# Altium PCB CSP - potentiometers_a.PcbDoc
Units mm, origin at the board's own origin, x right, y up, seen from the top; angles counter-clockwise.
Board outline 41.66 x 43.94 mm, 2 copper layers (Top Layer, Bottom Layer); 38 components, 21 nets, 80 pads, 0 vias.
Unrouted connection lines stored in the file: 10.
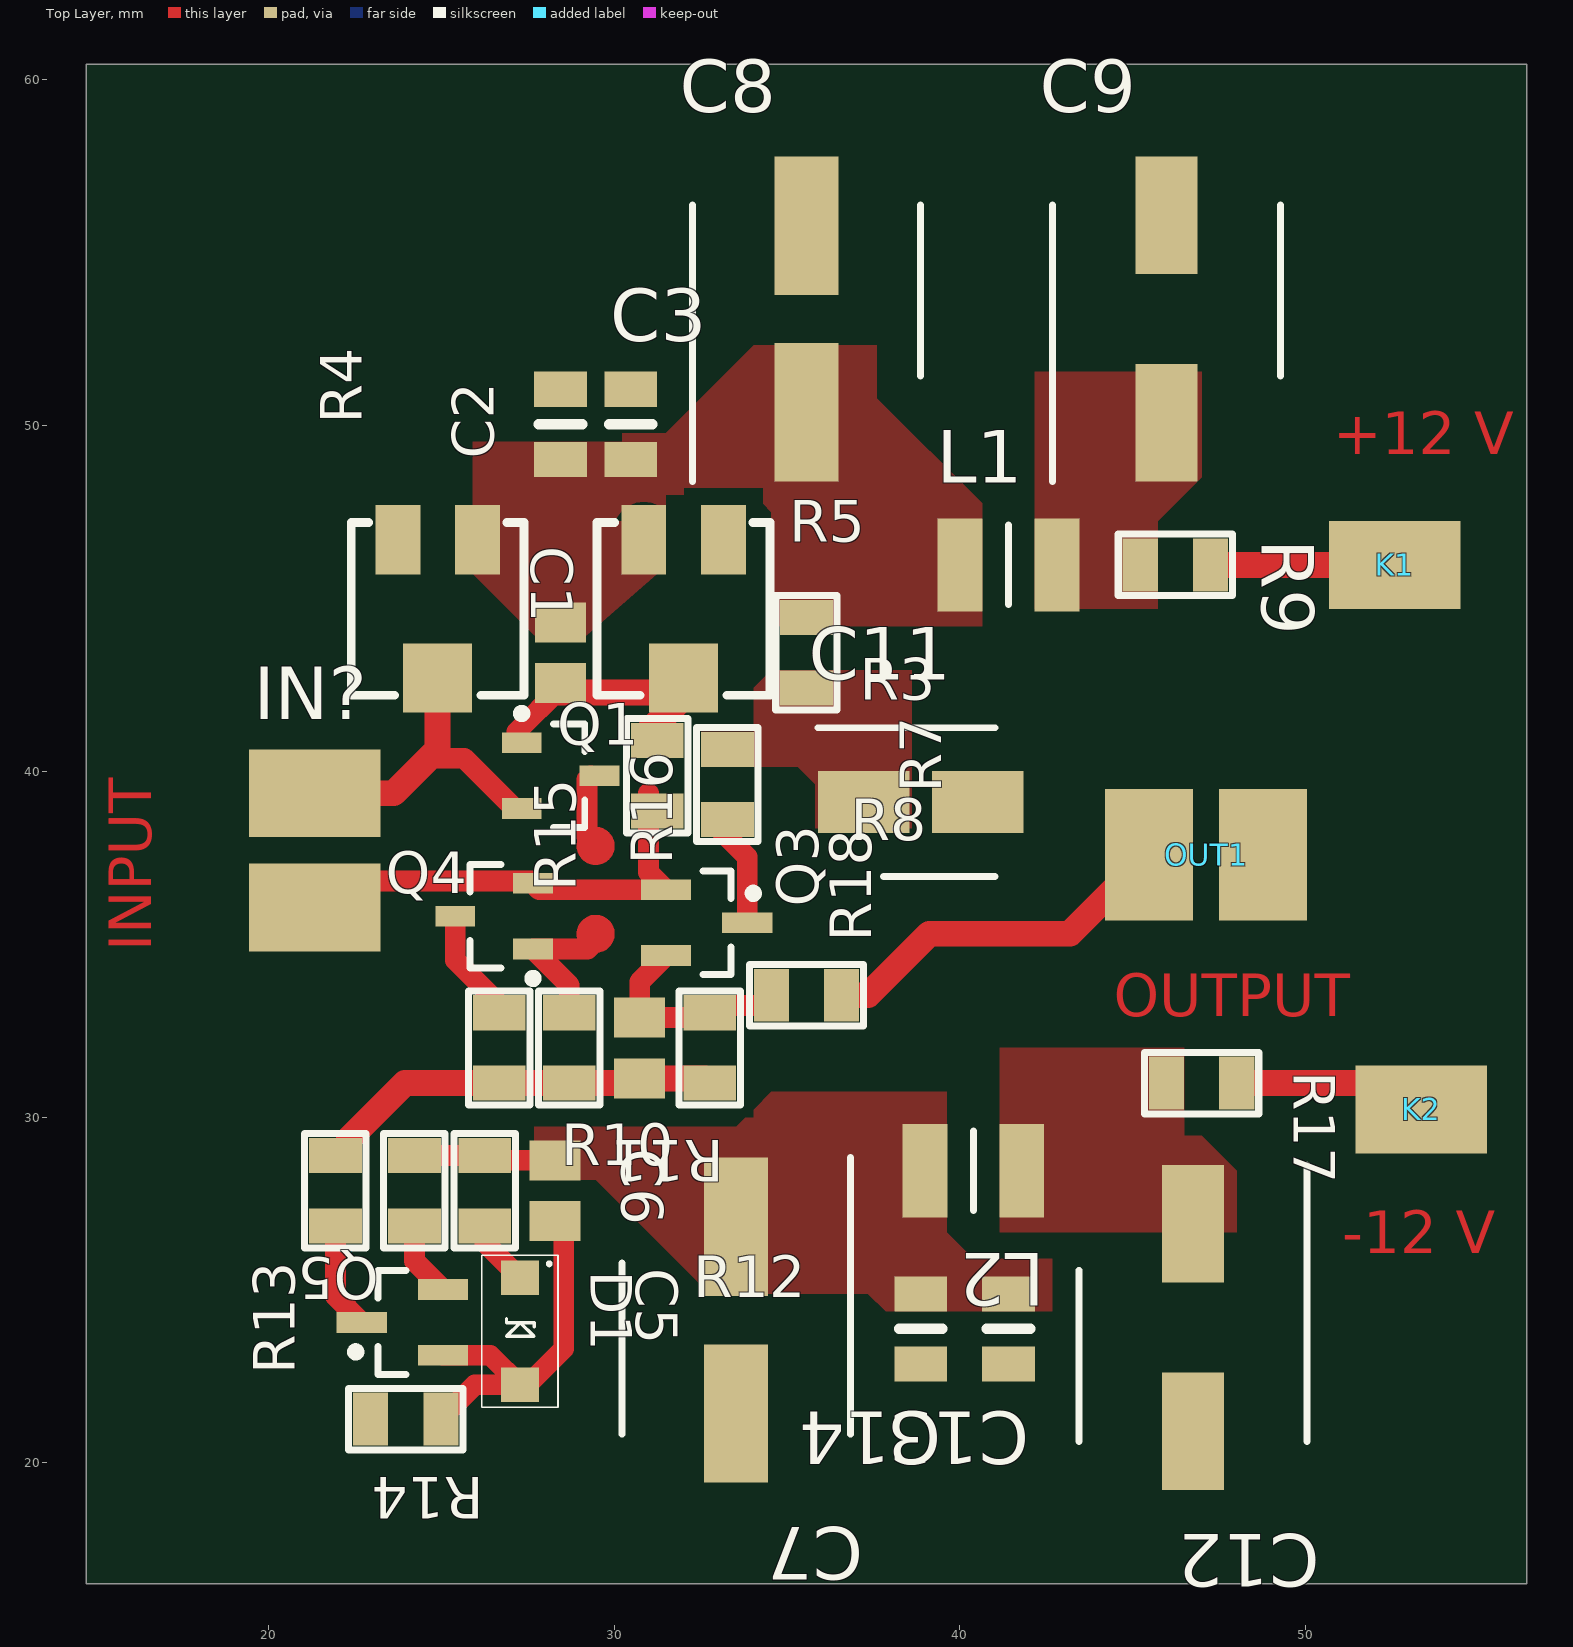
[diagram p0: Top Layer view]
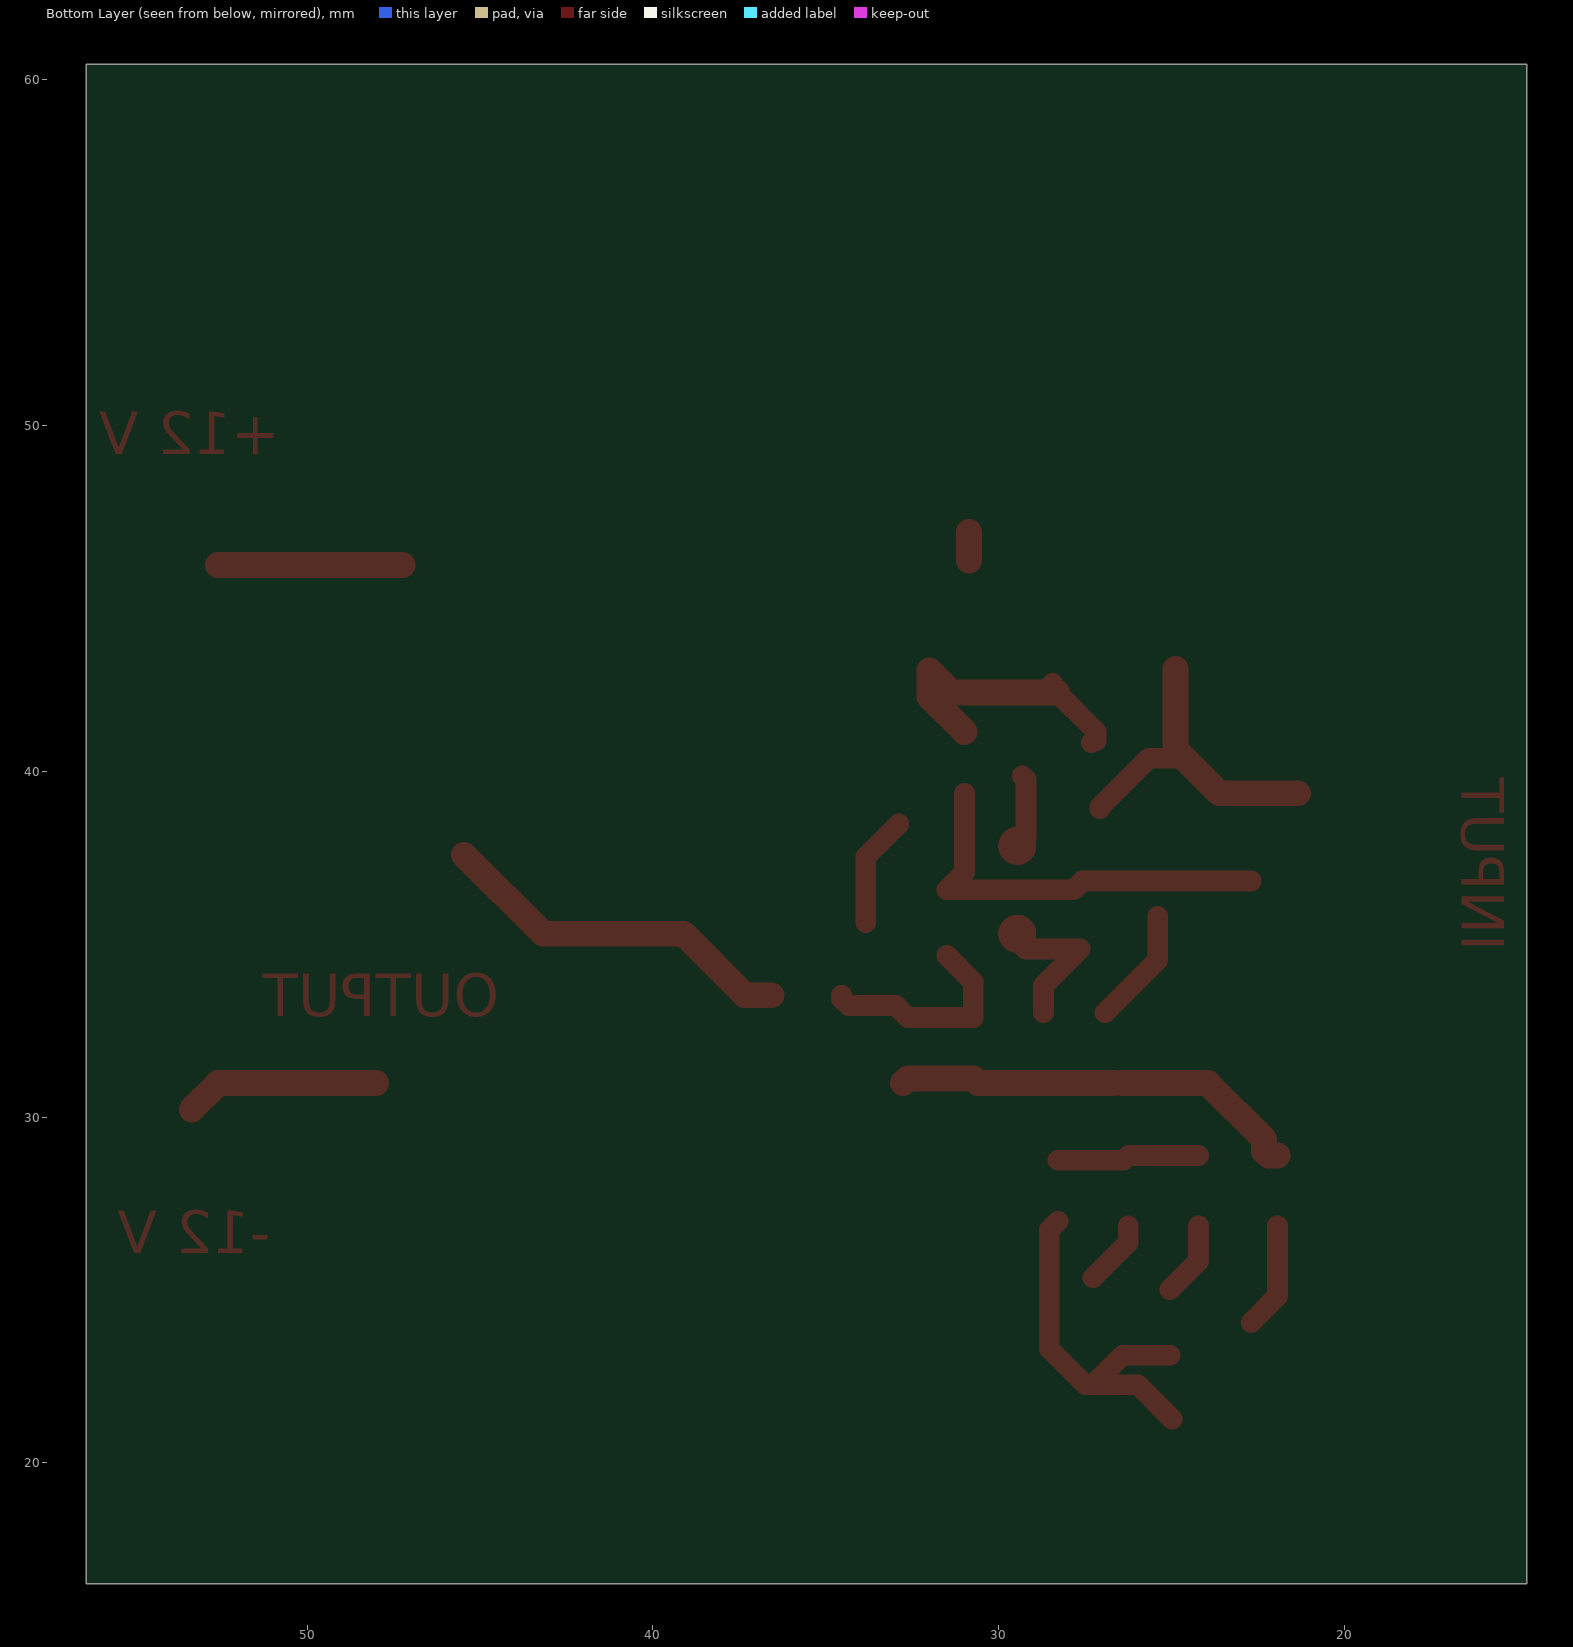
[diagram p1: Bottom Layer view, seen from below]
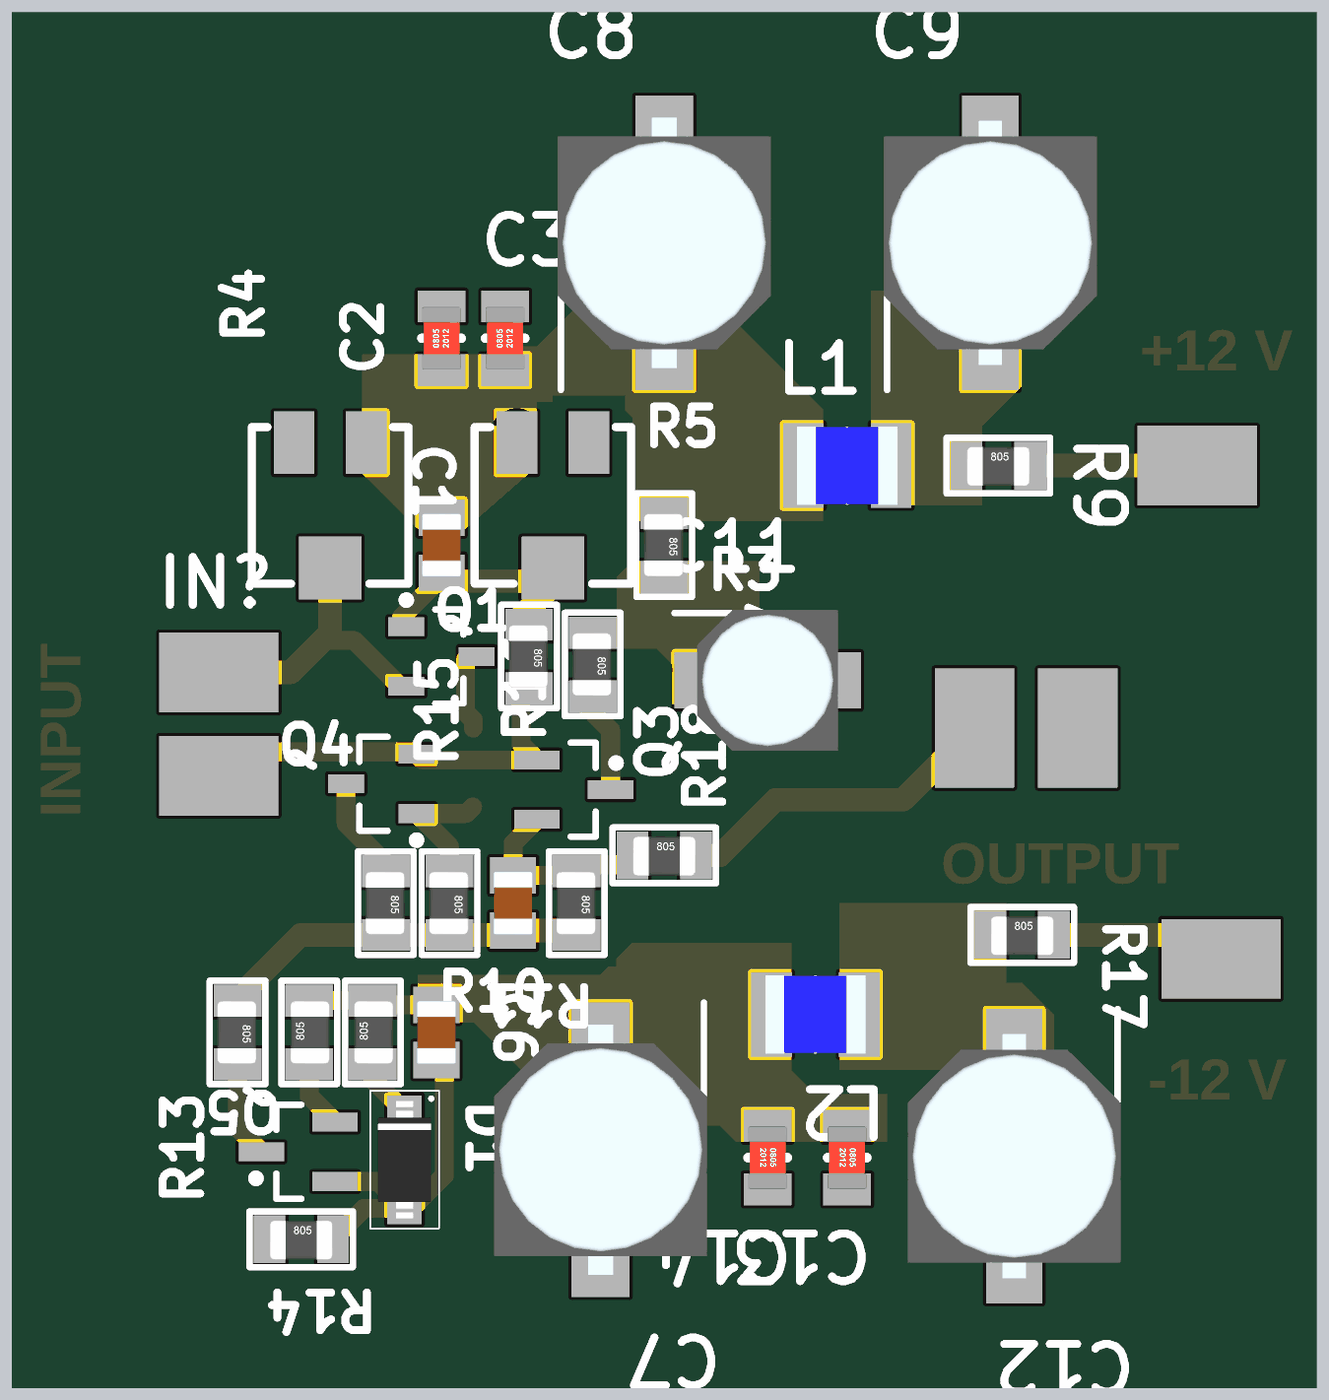
[diagram p2: 3D render of the assembled board from above, using the file's embedded part models]

## Layer stack, top to bottom
Top Solder: solder mask 0.0102, Solder Resist, Dk 3.5
Top Layer: signal copper 0.0356
Dielectric 1: dielectric 0.32, FR-4, Dk 4.8
Bottom Layer: signal copper 0.0356
Bottom Solder: solder mask 0.0102, Solder Resist, Dk 3.5

## Board outline
14.732,16.51 56.388,16.51 56.388,60.452 14.732,60.452

## Design rules (kind name [scope] priority, off if disabled: settings)
Clearance [All] p1: gap=0.254 ignorepadtopadclearanceinfootprint=FALSE except(0: Arc-Hole Track-Hole SMDPad-Hole THPad-Hole Via-Hole Fill-Hole Poly-Text Poly-Hole Region-Hole Text-Hole; 0.3: Arc-Arc Arc-Track Arc-SMDPad Arc-THPad Arc-Via Arc-Fill Arc-Poly Arc-Region Arc-Text Track-Track Track-SMDPad Track-THPad Track-Via Track-Fill Track-Region Track-Text; 0.5: Track-Poly SMDPad-Poly)
PlaneConnect [All] p1: planeconnectstyle=Direct reliefexpansion=0.508 reliefentries=4 reliefconductorwidth=0.254 reliefairgap=0.254
PolygonConnect [All] p1: connectstyle=Direct reliefconductorwidth=0.254 reliefentries=4 polygonreliefangle="90 Angle" airgapwidth=0.254
RoutingVias [All] p1: holewidth=0.711 width=1.27 viastyle="Through Hole" minholewidth=0.711 minwidth=1.27 maxholewidth=0.711 maxwidth=1.27
SolderMaskExpansion [All] p1: expansion=0.102 istentingtop=FALSE
Width [All] p1: maxlimit=1 minlimit=0.254 preferedwidth=0.6 toplayer_minwidth=0.5 bottomlayer_maxwidth=0.254 bottomlayer_prefwidth=0.254 minimp=50.000000 maximp=50.000000 favimp=50.000000
29 further rules are at their usual default settings.

## Components (designator, comment, footprint, x,y, rotation, side; value= is the part's Value field where it differs from the comment)
C1 "Cap" *CAPC2012X94N 28.448,43.434 r90 top value=1uF
C2 "Cap" SMD-0805C 28.448,50.038 r0 top value=0.1uF
C3 "Cap" SMD-0805C 30.48,50.038 r0 top value=0.01uF
C5 "Cap" *CAPC2012X94N 30.734,32.004 r90 top value=1uF
C6 "Cap" *CAPC2012X94N 28.286,27.874 r270 top value=0.01uF
C7 "#NAME?" CAPAE660X550N 33.528,24.13 r270 top value=22uF
C8 "#NAME?" CAPAE660X550N 35.56,53.086 r90 top value=22uF
C9 "#NAME?" CAPAE660X800N 45.974,53.086 r90 top value=100uF
C11 "#NAME?" CAPAE430X550N 38.862,39.116 r0 top value=1uF
C12 "#NAME?" CAPAE660X800N 46.736,23.924 r270 top value=100uF
C13 "Cap" SMD-0805C 41.402,23.876 r180 top value=0.1uF
C14 "Cap" SMD-0805C 38.862,23.876 r180 top value=0.01uF
D1 "Diode" SODFL350X110-2N 27.27,23.81 r270 top
IN? "INPUT" IN/OUT 21.336,39.37 r0 top
K1 "+12V" PAD 52.578,45.974 r0 top
K2 "-12V" PAD 53.34,30.226 r180 top
L1 "390uH" INDC3225X270N 41.402,45.974 r0 top
L2 "390uH" INDC3225X270N 40.386,28.448 r180 top
OUT1 "OUTPUT" IN/OUT 45.466,37.592 r90 top
Q1 "2N3906 PNP" SOT-23B_N 28.448,39.878 r0 top
Q3 "2N3904 NPN" SOT23_M 32.671,35.626 r0 top
Q4 "2N3906 PNP" SOT-23B_N 26.525,35.814 r180 top
Q5 "2N3904 NPN" SOT23_M 23.873,24.064 r180 top
R3 "Res1" SMD-0805-RES 35.56,43.434 r180 top value=33
R4 "RPot SM" POT4MM-2 24.892,44.704 r270 top
R5 "RPot SM" POT4MM-2 32.004,44.704 r270 top
R7 "Res1" SMD-0805-RES 31.242,39.878 r180 top value=3K
R8 "Res1" SMD-0805-RES 33.274,39.624 r180 top value=33
R9 "Res1" SMD-0805-RES 46.228,45.974 r270 top value=100
R10 "Res1" SMD-0805-RES 28.702,32.004 r180 top value=15k
R11 "Res1" SMD-0805-RES 32.766,32.004 r180 top value=500
R12 "Res1" SMD-0805-RES 26.67,32.004 r180 top value=33
R13 "Res1" SMD-0805-RES 21.936,27.874 r180 top value=33
R14 "Res1" SMD-0805-RES 23.968,21.27 r270 top value=10K
R15 "Res1" SMD-0805-RES 24.222,27.874 r0 top value=100
R16 "Res1" SMD-0805-RES 26.254,27.874 r0 top value=1.4k
R17 "100" SMD-0805-RES 46.99,30.988 r270 top
R18 "Res1" SMD-0805-RES 35.56,33.528 r270 top value=51

## Footprints (in the part's own frame and the unit in brackets; to place one, negate y for a bottom-side part, rotate by r counter-clockwise, add the part's x,y. Pads: shape width x height; smd on the part's side, far side on the other; paste and mask are expansions set on the pad)
*CAPC2012X94N [mm]
  rect 1.16x1.47 smd: 1(-0.88,0) 2(0.88,0)
  body extent -1,-0.62 1.01,0.63, height 0.94
CAPAE430X550N [mm]
  rect 2.65x1.8 smd: 1(-1.65,0) 2(1.65,0)
  silkscreen extent -2.98,-2.15 2.15,2.15, body extent -2.25,-2.25 2.25,2.25, height 5.5
CAPAE660X550N [mm]
  rect 4x1.85 smd: 1(-2.7,0) 2(2.7,0)
  silkscreen extent -4.7,-3.3 3.3,3.3, body extent -4,-3.4 4,3.4, height 5.5
CAPAE660X800N [mm]
  rect 3.4x1.8 smd: 1(-3,0) 2(3,0)
  silkscreen extent -4.7,-3.3 3.3,3.3, body extent -3.9,-3.4 3.9,3.4, height 8
IN/OUT [mil]
  rect 150x100 smd: 1(0,0) 2(0,-130)
INDC3225X270N [mm]
  rect 1.3x2.7 smd: 1(-1.4,0) 2(1.4,0)
  silkscreen extent 0,-1.15 0,1.15, body extent -1.6,-1.25 1.6,1.25, height 2.7
PAD [mm]
  rect 3.81x2.54 smd: 1(0,0)
POT4MM-2 [mm] "Square Trimming Potentiometer"
  rect 2x1.3 smd: CCW(-2,-1.15) CW(-2,1.15)
  rect 2x2 smd: W(2,0)
  silkscreen extent -2.5,-2.5 2.5,2.5
SMD-0805-RES [mil]
  rect 60x40 smd: 1(0,40) 2(0,-40)
  silkscreen extent -35,-65 35,65, body extent -24,-39 26,39, height 31
SMD-0805C [mil]
  rect 60x40 smd: 1(0,40) 2(0,-40)
  silkscreen extent -25,0 25,0, body extent -25,-39 25,39, height 35
SODFL350X110-2N [mm] "SODFL, 2-Leads, Body 1.70x3.50mm, IPC Medium Density"
  rect 1x1.1 smd: A(1.55,0) C(-1.55,0)
  silkscreen extent -2.2,-1.1 2.2,1.1, body extent -1.87,-0.85 1.88,0.85, height 1.2
SOT23_M [mm] "SOT23, 3-Leads, Body 2.9x1.3mm, Pitch 0.95mm, Lead Span 2.3mm - Reverse Pinning, IPC Low Density"
  rect 1.45x0.6 smd: 1(1.175,0) 2(-1.175,-0.95) 3(-1.175,0.95)
  silkscreen extent -0.1,-1.5 1.48,1.5, body extent -0.7,-1.5 0.7,1.5, height 1.1
SOT-23B_N [mm] "SOT23, 3-Leads, Body 2.9x1.3mm, Pitch 0.95mm, Lead Span 2.4mm, IPC Medium Density"
  rect 1.15x0.6 smd: 1(-1.125,0.95) 2(-1.125,-0.95) 3(1.125,0)
  silkscreen extent -1.25,-1.5 0.7,1.92, body extent -0.7,-1.5 0.7,1.5, height 1.14

## Part data
C1 C2 C3 C5 C6 C13 C14: "Capacitor", LatestRevisionDate=17-Jul-2002, LatestRevisionNote="Re-released for DXP Platform.", PackageDescription="Radial Cap, Thru-Hole; 2 Leads; 0.3 in Pin Spacing", PackageReference=RAD-0.3, Published=8-Jun-2000, Publisher="Altium Limited"
C7 C8: library part TYEH1V226F55MTR, "22uF 35V, Capacitor Polarised", Voltage=35V, Dimension=6.3x5.3mm, Part number=TYEH1V226F55MTR
C9 C12: library part EEEFK1E101P, "100uF 25V, cap polarised", Voltage=25V, Dimensions=8x6.2mm, Part number=EEEFK1E101P
C11: library part UWT1H010MCL1GB, "1uF 50V, Capacitor Polarised", Manufacturer_Name=Nichicon, Voltage=50V, Dimensions=4x5.4mm, Part number=UWT1H010MCL1GB
L1 L2: library part NLV10JT391, "390uH, Inductor", Package=1210, Resistance=36
Q1 Q4: library part PNP, "PNP Bipolar Transistor", LatestRevisionDate=29-May-2009, LatestRevisionNote="IPC-7351 Footprint Added.", PackageDescription="3-Pin SOT-23 Package 0.95 mm Pitch, 2.4 mm Lead Span", PackageReference=SOT-23B, PackageVersion=Aug-1999, Published=8-Jun-2000, Publisher="Altium Limited"
Q3 Q5: library part NPN, "NPN Bipolar Transistor", Code_JEDEC=TO-226-AA, LatestRevisionDate=17-Jul-2002, LatestRevisionNote="Re-released for DXP Platform.", PackageDescription="TO, Flat Index; 3 In-Line, Axial Leads; Body Dia. 4.8mm; Leads 0.55 x 0.51 mm (max)", PackageReference=TO-226-AA, Published=8-Jun-2000, Publisher="Altium Limited"
R3 R7 R8 R9 R10 R11 R12 R13 R14 R15 R16 R18: "Resistor", LatestRevisionDate=17-Jul-2002, LatestRevisionNote="Re-released for DXP Platform.", PackageDescription="Axial Device, Thru-Hole; 2 Leads; 0.3 in Pin Spacing", PackageReference=AXIAL-0.3, Published=8-Jun-2000, Publisher="Altium Limited"
R4 R5: "Square Trimming Potentiometer", ComponentLink1Description="Manufacturer Link", ComponentLink1URL=http://bourns.com/2/search.html, DatasheetVersion=Oct-2003, PackageDescription="Square Trimming Potentiometer", PackageReference=POT4MM-2, Published=17-Dec-2003, Publisher="Altium Limited"
R17: library part Res1, "Resistor", LatestRevisionDate=17-Jul-2002, LatestRevisionNote="Re-released for DXP Platform.", PackageDescription="Axial Device, Thru-Hole; 2 Leads; 0.3 in Pin Spacing", PackageReference=AXIAL-0.3, Published=8-Jun-2000, Publisher="Altium Limited"

## Nets (pads, with @x,y where several pads share a name; then routed paths per layer and width w, separated by ;. In a path a pad name is that pad's centre, name@x,y a point inside that pad or via, vN(x,y) a via of type N, cw(c..) or ccw(c..) an arc to the next point about the centre after c; other vN are vias at no path point)
GND: C2.1 C3.1 C7.2 C8.2 C9.2 C11.2 C12.2 C13.1 C14.1 R14.2
NetC1_1: C1.1 Q1.1 R5.W R7.2 | length 8.5
  Top Layer w0.6: Q1.1 27.257,40.894 27.178,40.894 27.178,41.148 28.448,42.418 C1.1
  Top Layer w0.75: C1.1@28.318,42.288 31.366,42.288 32.004,42.926 32.004,42.164 R7.2@30.988,41.148
NetC1_2: C1.2 C2.2 C3.2 C8.1 L1.1 R3.2 R4.CW R5.CCW | length 0.8
  Top Layer w0.75: R5.CCW@30.854,46.108 R5.CCW@30.854,46.926
NetC5_1: C5.1 R10.1 R11.1 R12.1 R13.2 | length 12
  Top Layer w0.6: R12.1@26.416,30.988 R12.1 ; C5.1@30.598,30.988 C5.1
  Top Layer w0.75: R13.2 22.19,28.89 22.323,29.023 22.323,29.364 23.947,30.988 R12.1@26.416,30.988 ; R12.1 R10.1 C5.1@30.598,30.988 ; C5.1 32.63,31.124 R11.1
NetC5_2: C5.2 Q3.2 R11.2 R18.2 | length 6.2
  Top Layer w0.6: Q3.2 30.734,33.914 C5.2 32.63,32.884 32.974,33.228 34.336,33.228 34.544,33.436 R18.2
NetC6_1: C6.1 C7.1 C13.2 C14.2 L2.2 R15.1 R16.1 | length 4.1
  Top Layer w0.6: R15.1 R16.1 26.39,28.754 C6.1
NetC6_2: C6.2 D1.A Q5.3 R14.1 | length 10.8
  Top Layer w0.6: R14.1 25.974,22.26 D1.A ; Q5.3 26.416,23.114 D1.A ; C6.2 28.54,26.74 28.54,23.302 27.498,22.26 D1.A
NetC9_1: C9.1 L1.2 R9.2
NetC11_1: C11.1 R3.1 R8.2
NetC12_1: C12.1 L2.1 R17.2
NetD1_C: D1.C R16.2 | length 1.9
  Top Layer w0.6: R16.2 26.254,26.376 D1.C
NetIN?_1: IN?.1 Q1.2 R4.W | length 9.6
  Top Layer w0.6: 24.765,40.513 24.892,40.386 25.357,40.386 ; 25.146,40.386 25.654,40.386 27.069,38.971 Q1.2@27.069,38.928
  Top Layer w0.75: IN?.1 23.622,39.37 24.765,40.513 24.892,40.64 R4.W R4.W@24.892,42.958
NetIN?_2: IN?.2 Q3.3 Q4.2 R7.1 | length 11.9
  Top Layer w0.6: IN?.2@22.702,36.83 27.584,36.83 Q4.2 27.838,36.576 Q3.3 30.988,37.084 30.988,39.37
NetK1_1: K1.1 R9.1 | length 5.3
  Top Layer w0.75: R9.1 K1.1
NetK2_1: K2.1 R17.1 | length 5.6
  Top Layer w0.75: R17.1 52.578,30.988 K2.1
NetOUT1_1: OUT1.1 R18.1 | length 10.6
  Top Layer w0.75: R18.1 37.338,33.528 39.116,35.306 43.18,35.306 OUT1.1
NetQ1_3: Q1.3 Q4.1 R10.2 | length 10.4
  Top Layer w0.5: 29.764,35.306 ccw(c29.464,35.306) 29.764,35.306 ; 29.764,37.846 ccw(c29.464,37.846) 29.764,37.846
  Top Layer w0.6: R10.2 28.702,33.812 Q4.1 29.228,34.864 29.441,35.076 ; Q1.3@29.319,39.878 29.21,39.769 29.21,38.1 29.252,38.058 29.464,37.846 29.464,37.592
NetQ3_1: Q3.1 R8.1 | length 3.2
  Top Layer w0.6: R8.1@32.893,38.481 33.846,37.528 Q3.1
NetQ4_3: Q4.3 R12.2 | length 3.4
  Top Layer w0.6: Q4.3 25.4,34.544 R12.2@26.924,33.02
NetQ5_1: Q5.1 R13.1 | length 3.1
  Top Layer w0.6: R13.1 21.936,24.826 Q5.1
NetQ5_2: Q5.2 R15.2 | length 2.2
  Top Layer w0.6: R15.2 24.222,25.84 Q5.2
pads on no net: OUT1.2 R4.CCW R5.CW

## Polygon pours and split planes (outlines as drawn)
NetC11_1 on Top Layer "NETC11_1_L01_P025" (solid, pour order 25): 32.512,41.148 34.036,41.148 34.036,42.418 34.544,42.926 38.608,42.926 38.608,38.354 35.814,38.354 35.814,39.624 35.306,40.132 32.512,40.132
NetC1_2 on Top Layer "NETC1_2_L01_P024" (solid, pour order 24): 40.64,44.196 40.64,47.752 37.592,50.8 37.592,52.324 34.036,52.324 31.496,49.784 30.226,49.784 30.226,48.006 34.036,48.006 34.544,47.498 34.544,44.196
NetC1_2 on Top Layer "NETC1_2_L01_P023" (solid, pour order 23): 25.908,45.72 25.908,49.53 31.496,49.53 31.496,45.72
NetC9_1 on Top Layer "NETC9_1_L01_P022" (solid, pour order 22): 42.164,44.704 42.164,51.562 46.99,51.562 46.99,48.514 45.72,47.244 45.72,44.704
NetC12_1 on Top Layer "NETC12_1_L01_P021" (solid, pour order 21): 41.148,32.004 46.482,32.004 46.482,29.464 46.99,29.464 48.006,28.448 48.006,26.67 41.148,26.67
NetC6_1 on Top Layer "NETC6_1_L01_P020" (solid, pour order 20): 27.686,29.718 33.528,29.718 34.544,30.734 39.624,30.734 39.624,26.67 40.386,25.908 42.672,25.908 42.672,24.384 37.846,24.384 37.338,24.892 32.766,24.892 29.464,28.194 27.686,28.194
NetC1_2 on Top Layer "NETC1_2_L01_P013" (solid, pour order 13): 25.908,47.244 25.908,45.72 27.686,43.942 29.21,43.942 31.242,45.72 31.242,47.244
GND on Top Layer "GND_L01_P019" (solid, pour order 19): 89.916,72.136 89.916,86.868 97.536,86.868 98.552,87.884 101.854,87.884 102.87,88.9 104.902,88.9 105.41,88.392 105.41,86.106 106.172,85.344 109.22,85.344 109.474,85.09 109.474,83.312 109.982,82.804 111.506,82.804 112.014,82.296 112.014,74.168 116.078,74.168 116.078,69.088 108.966,69.088 108.966,67.564 108.458,67.056 102.616,67.056 102.616,63.5 103.124,62.992 104.14,62.992 104.14,59.69 96.774,59.69 96.266,60.198 90.17,60.198 90.17,62.992 91.186,64.008 91.186,66.294 90.678,66.802 90.678,72.136 82.804,72.136 82.804,56.896 121.92,56.896 121.92,93.218 82.804,93.218 82.804,72.136
no net on Top Layer "NONET_L01_P018" (solid, pour order 18): 18.288,34.798
no net on Top Layer "NONET_L01_P017" (solid, pour order 17): 18.288,35.179
no net on Top Layer "NONET_L01_P008" (solid, pour order 8): 25.908,101.346
no net on Top Layer "NONET_L01_P003" (solid, pour order 3): 55.88,85.852
no net on Top Layer "NONET_L01_P000" (solid, pour order 0): 47.244,93.98

## Other copper
Top Layer:
  text "+12 V" at 50.8,48.768 h2.1
  text "INPUT" at 17.018,34.798 h2.1 r90
  text "OUTPUT" at 44.45,32.512 h2.1
  text "GND" at 3.048,27.94 h2.1
  text "-12 V" at 51.054,25.654 h2.1

## Silkscreen, mask and mechanical layers (free items; w line width, h text height)
Mechanical 1:
  the board outline again, w0.3